# Altium PCB ST-LINK-V0.1.PcbDoc (part 1 of 3)
Units mm, origin at the board's own origin, x right, y up, seen from the top; angles counter-clockwise.
Board outline 100 x 100 mm, 2 copper layers (Top Layer, Bottom Layer); 380 components, 33 nets, 1370 pads, 550 vias.
Unrouted connection lines stored in the file: 288.
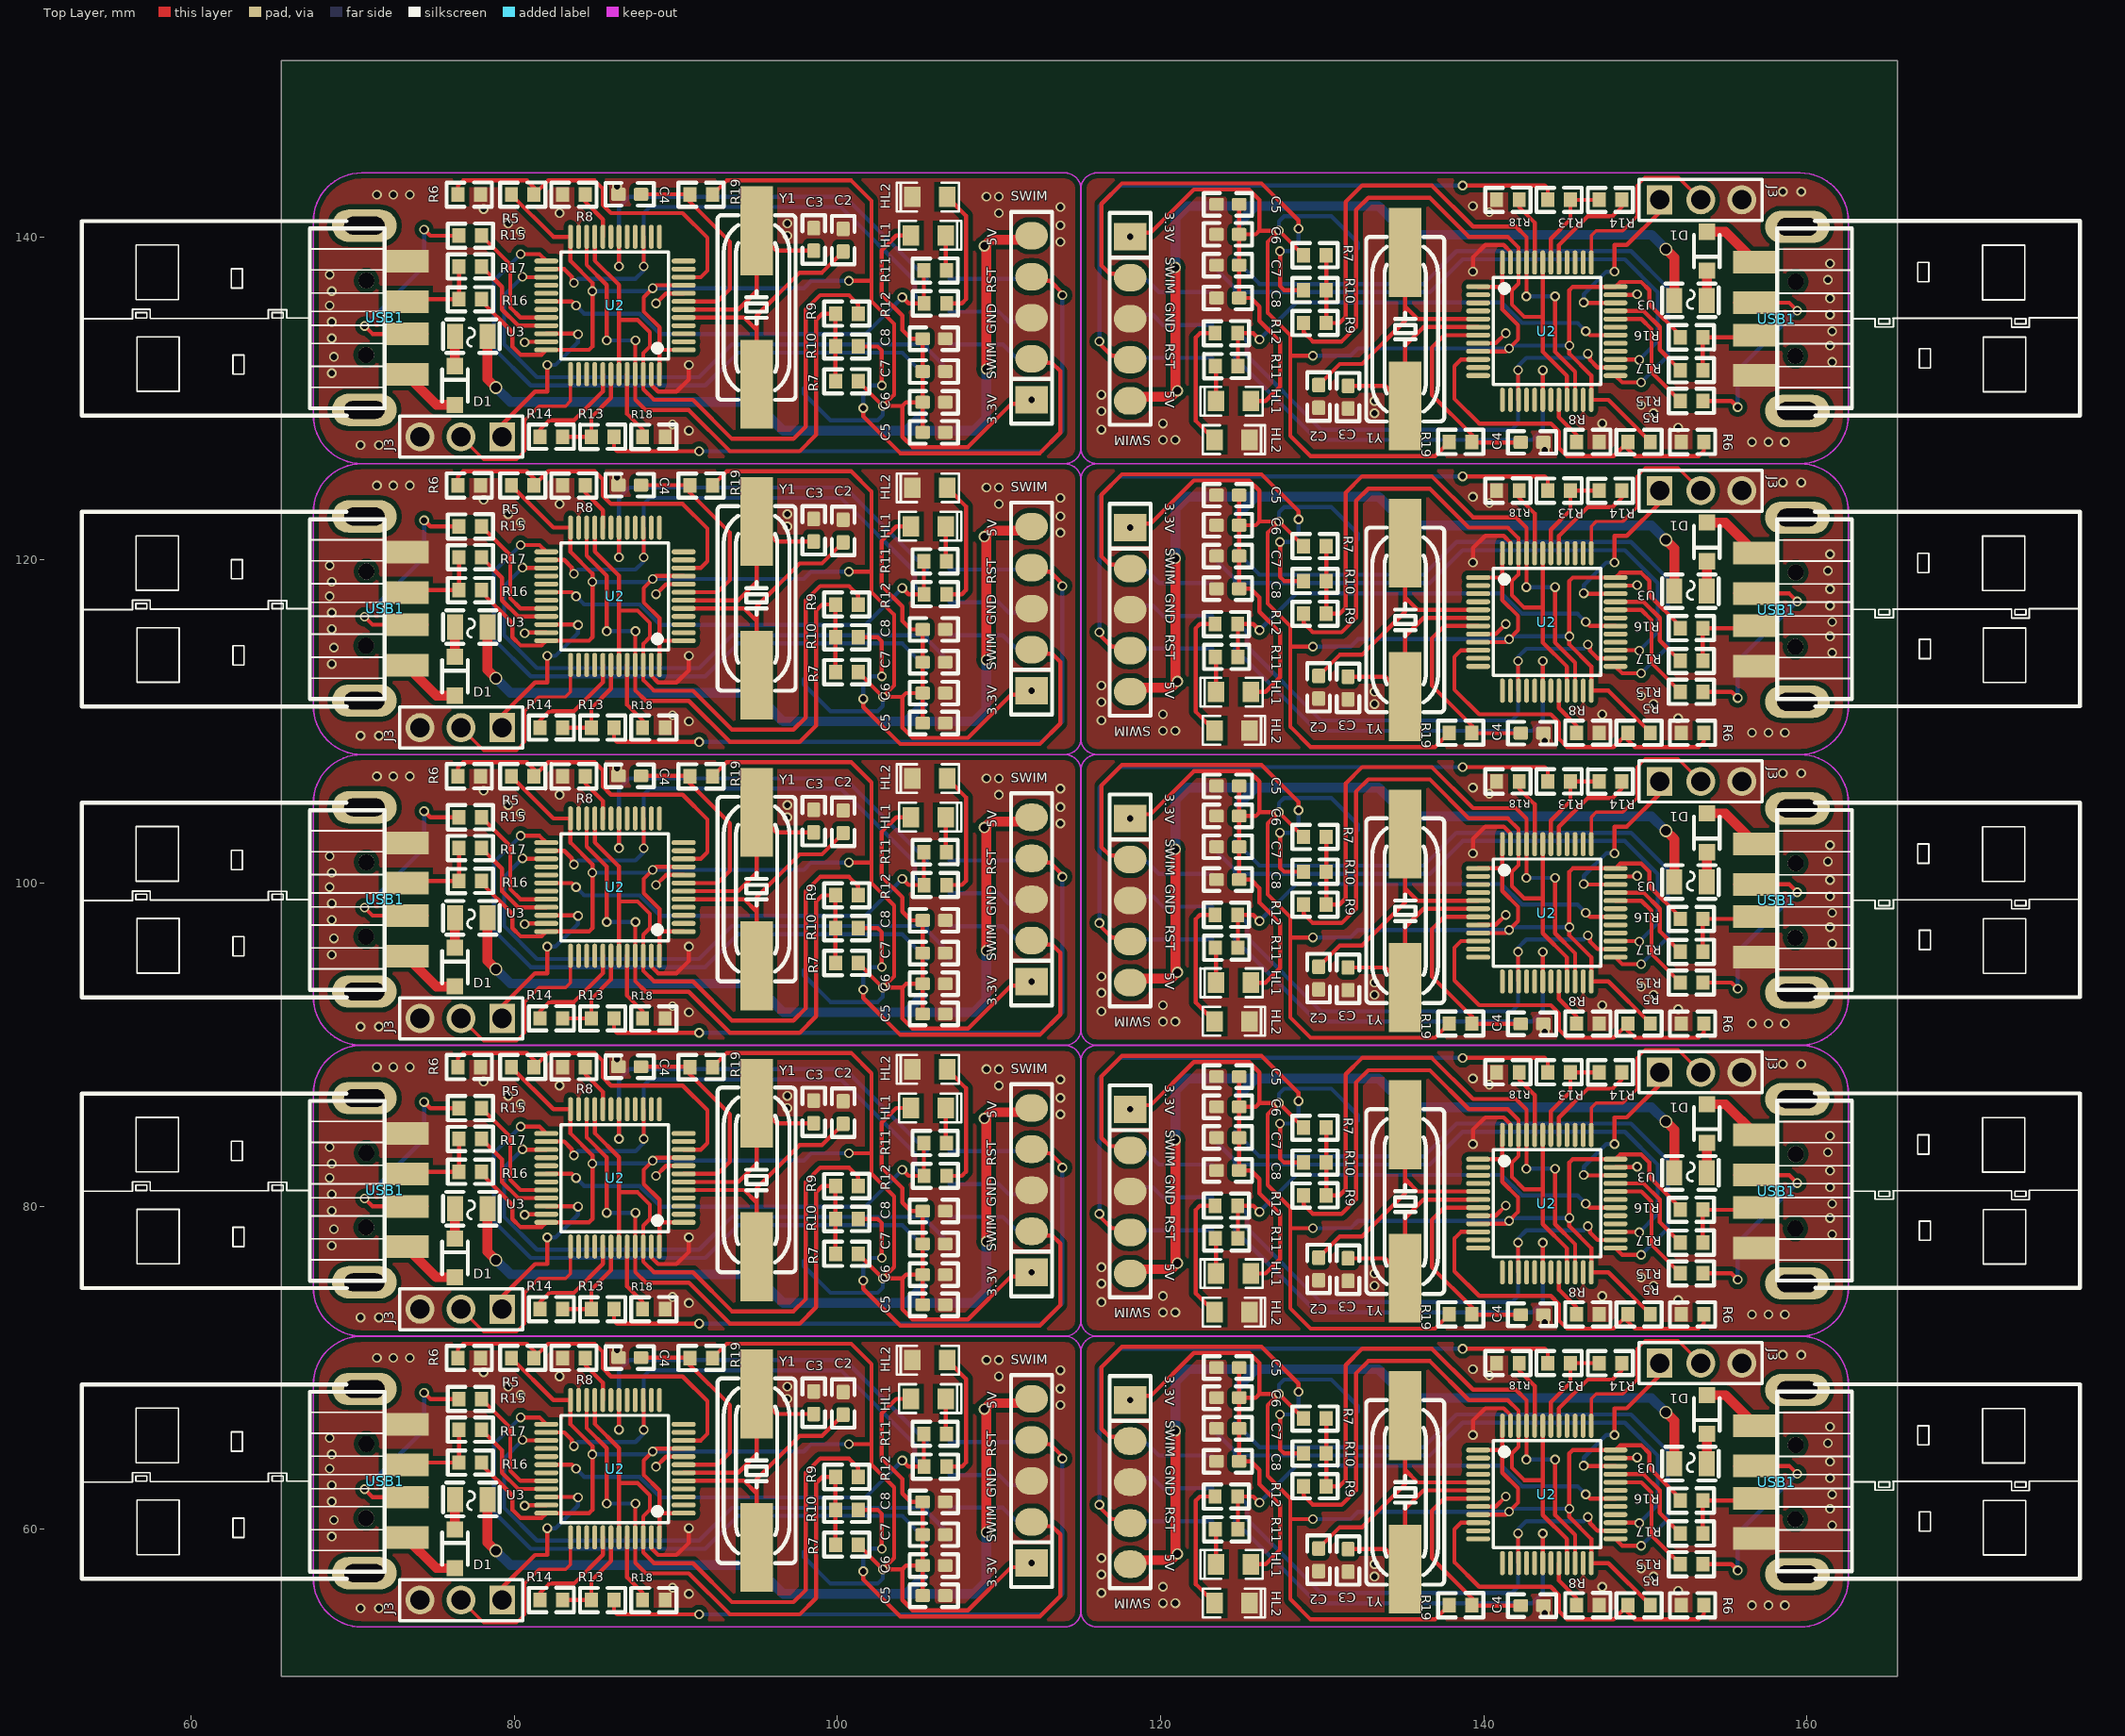
[diagram p0: Top Layer view]
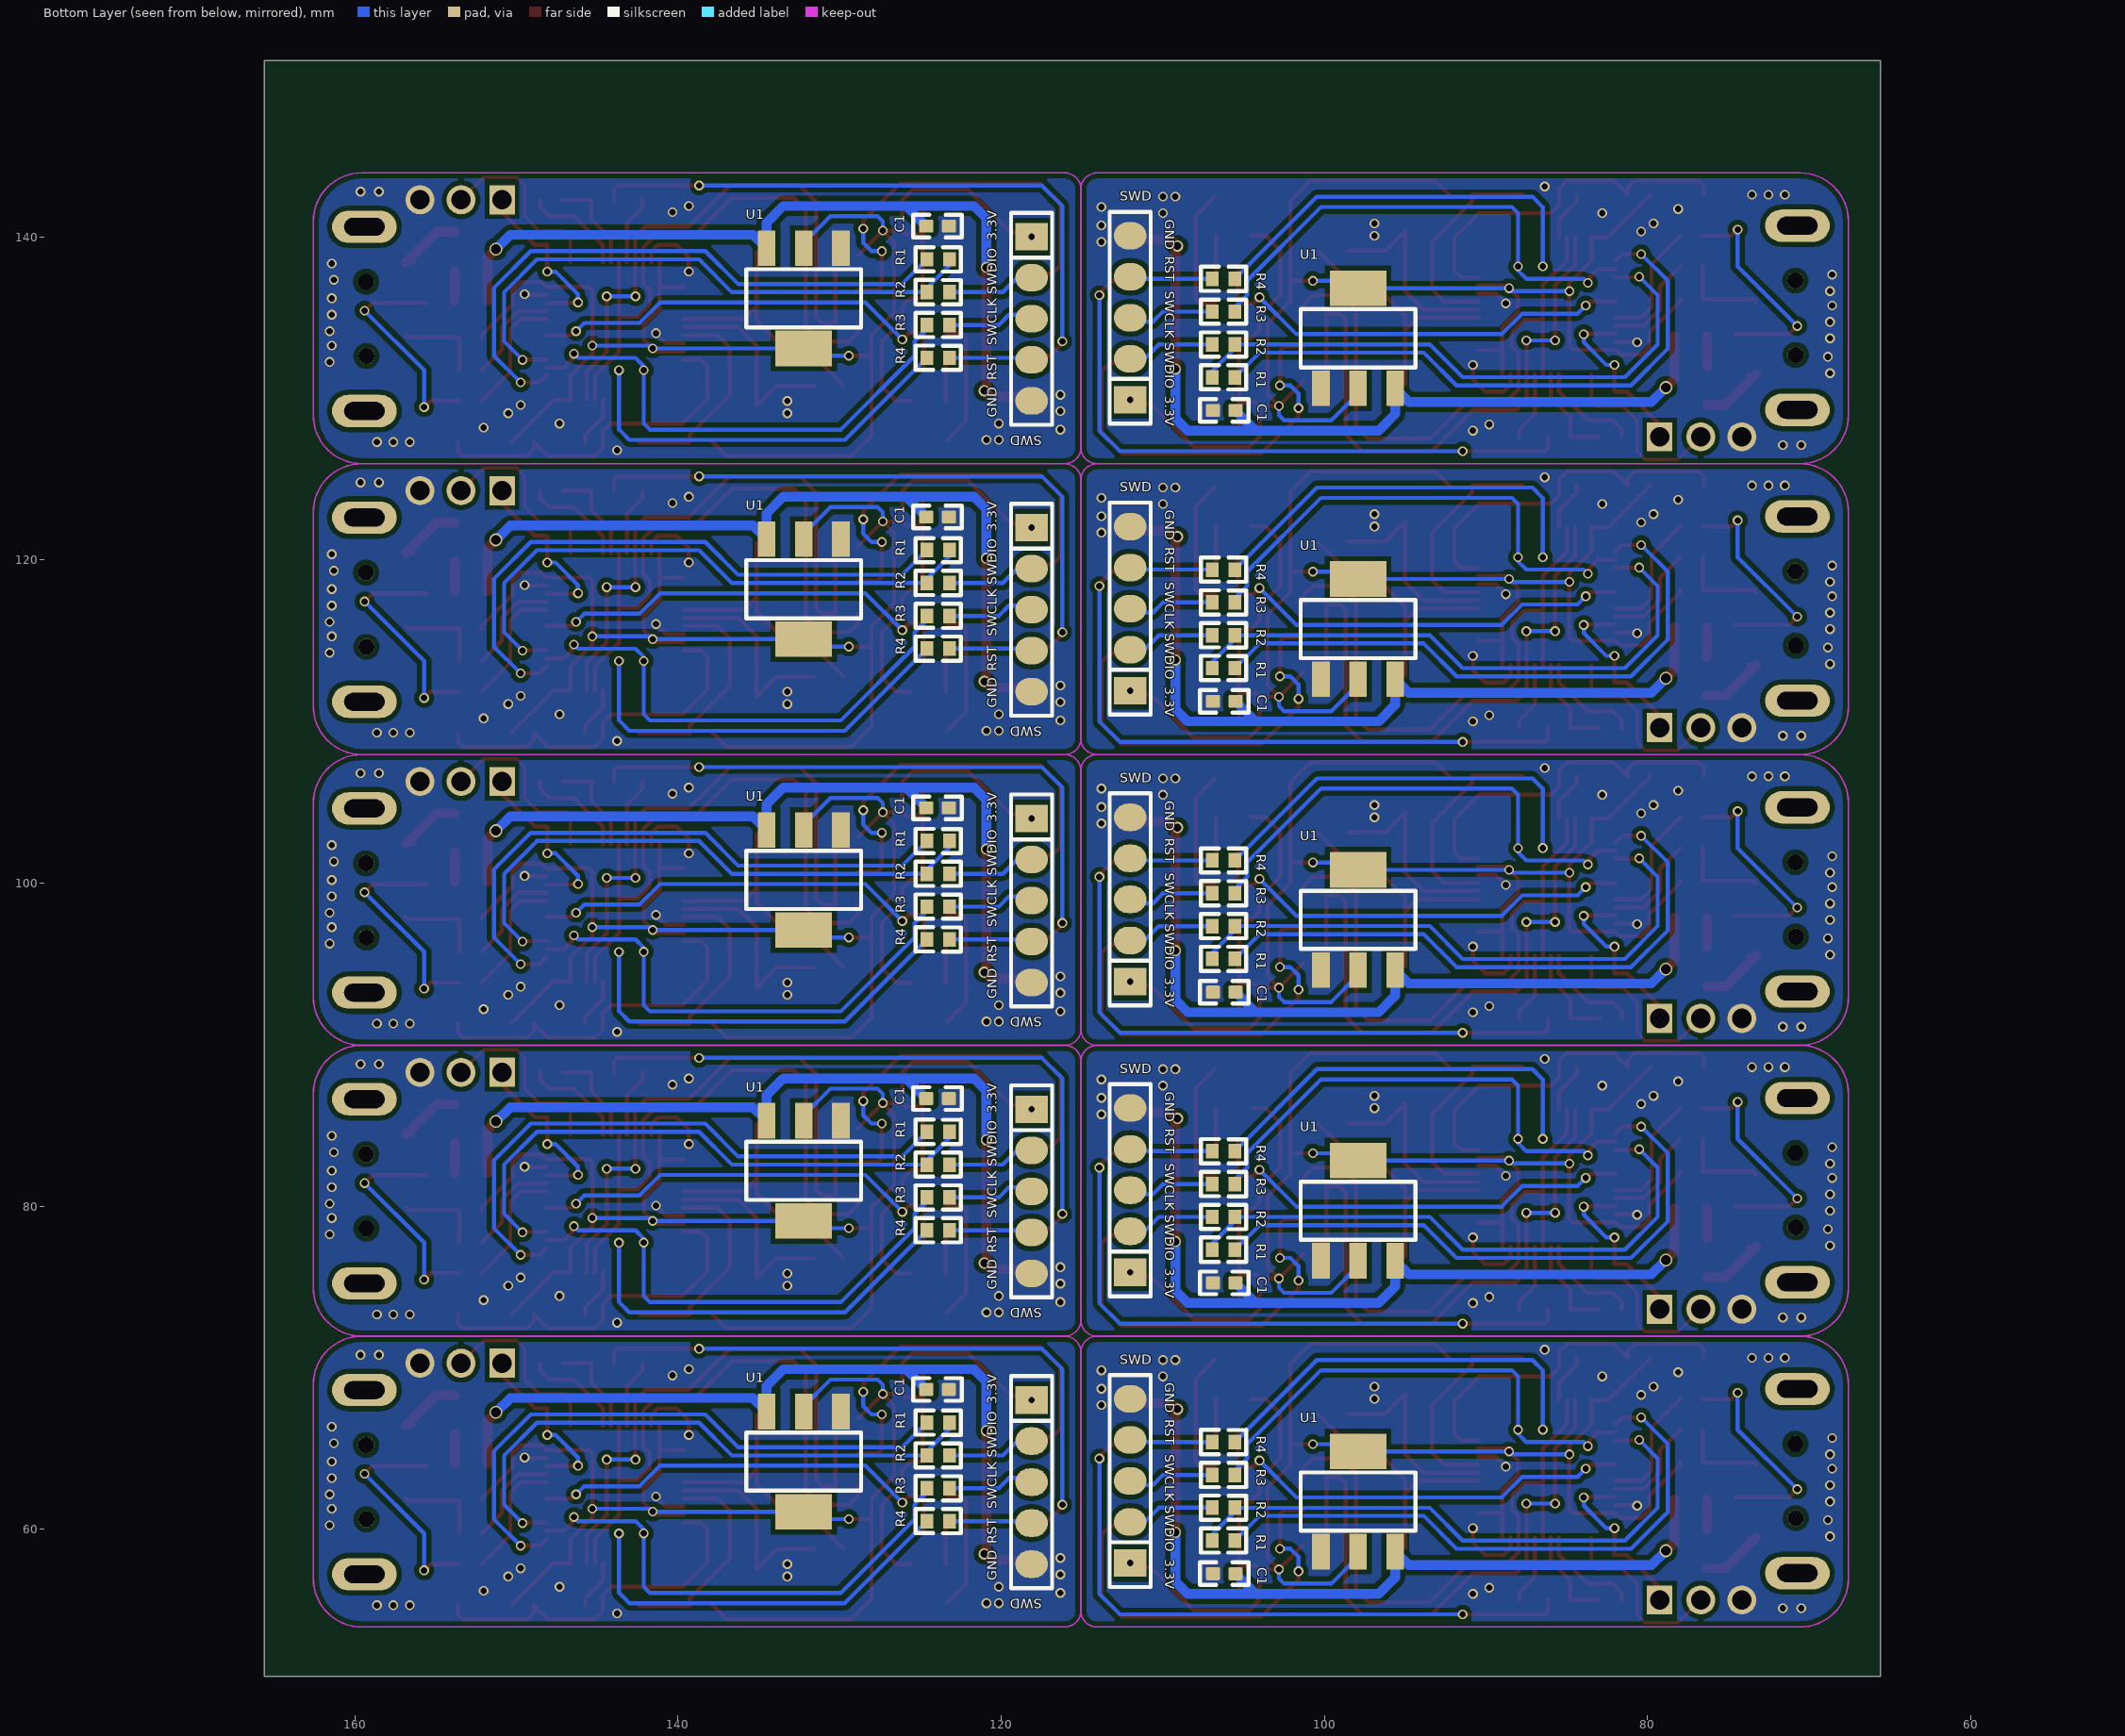
[diagram p1: Bottom Layer view, seen from below]

## Layer stack, top to bottom
Top Solder: solder mask 0.0102, Solder Resist, Dk 3.5
Top Layer: signal copper 0.0356
Dielectric 1: dielectric 0.32, FR-4, Dk 4.8
Bottom Layer: signal copper 0.0356
Bottom Solder: solder mask 0.0102, Solder Resist, Dk 3.5

## Board outline
65.582,50.896 65.582,150.897 165.582,150.897 165.582,50.896

## Design rules (kind name [scope] priority, off if disabled: settings)
Clearance Clearance_1 [InPolygon] p1: gap=0.3
Clearance [All] p2: gap=0.01
ComponentClearance [All] p1 off: gap=0.254 collisioncheckmode=3 verticalgap=0.254 showdistances=FALSE
PolygonConnect via [IsVia] p1: connectstyle=Direct reliefconductorwidth=0.254 reliefentries=4 polygonreliefangle="90 Angle" airgapwidth=0.254
PolygonConnect [All] p2: connectstyle=Direct reliefconductorwidth=0.254 reliefentries=4 polygonreliefangle="90 Angle" airgapwidth=0.254
RoutingVias [All] p1: holewidth=0.4 width=0.6 viastyle="Through Hole" minholewidth=0.3 minwidth=0.2 maxholewidth=0.8 maxwidth=1
SolderMaskExpansion [All] p1: expansion=0.102
Width [All] p1: maxlimit=5 minlimit=0.1 preferedwidth=0.254
29 further rules are at their usual default settings.

## Components (designator, comment, footprint, x,y, rotation, side; value= is the part's Value field where it differs from the comment)
C1 "10uF" 0603-C 106.172,129.404 r180 bottom
C1 "10uF" 0603-C 123.955,140.513 r0 bottom
C1 "10uF" 0603-C 106.172,111.404 r180 bottom
C1 "10uF" 0603-C 123.955,122.513 r0 bottom
C1 "10uF" 0603-C 106.172,93.404 r180 bottom
C1 "10uF" 0603-C 123.955,104.513 r0 bottom
C1 "10uF" 0603-C 106.172,75.404 r180 bottom
C1 "10uF" 0603-C 123.955,86.513 r0 bottom
C1 "10uF" 0603-C 123.955,68.513 r0 bottom
C1 "10uF" 0603-C 106.172,57.404 r180 bottom
C2 "22pF" 0603-C 100.203,139.818 r90 top
C2 "22pF" 0603-C 129.924,130.099 r270 top
C2 "22pF" 0603-C 100.203,121.818 r90 top
C2 "22pF" 0603-C 129.924,112.099 r270 top
C2 "22pF" 0603-C 100.203,103.818 r90 top
C2 "22pF" 0603-C 129.924,94.099 r270 top
C2 "22pF" 0603-C 100.203,85.818 r90 top
C2 "22pF" 0603-C 129.924,76.099 r270 top
C2 "22pF" 0603-C 129.924,58.099 r270 top
C2 "22pF" 0603-C 100.203,67.818 r90 top
C3 "22pF" 0603-C 98.679,139.818 r270 top
C3 "22pF" 0603-C 131.448,130.099 r90 top
C3 "22pF" 0603-C 98.679,121.818 r270 top
C3 "22pF" 0603-C 131.448,112.099 r90 top
C3 "22pF" 0603-C 98.679,103.818 r270 top
C3 "22pF" 0603-C 131.448,94.099 r90 top
C3 "22pF" 0603-C 98.679,85.818 r270 top
C3 "22pF" 0603-C 131.448,76.099 r90 top
C3 "22pF" 0603-C 131.448,58.099 r90 top
C3 "22pF" 0603-C 98.679,67.818 r270 top
C4 "0.1uF" 0603-C 87.122,142.485 r180 top
C4 "0.1uF" 0603-C 143.005,127.432 r0 top
C4 "0.1uF" 0603-C 87.122,124.485 r180 top
C4 "0.1uF" 0603-C 143.005,109.432 r0 top
C4 "0.1uF" 0603-C 87.122,106.485 r180 top
C4 "0.1uF" 0603-C 143.005,91.432 r0 top
C4 "0.1uF" 0603-C 87.122,88.485 r180 top
C4 "0.1uF" 0603-C 143.005,73.432 r0 top
C4 "0.1uF" 0603-C 143.005,55.432 r0 top
C4 "0.1uF" 0603-C 87.122,70.485 r180 top
C5 "10uF" 0603-C 105.948,127.753 r180 top
C5 "10uF" 0603-C 124.18,142.164 r0 top
C5 "10uF" 0603-C 105.948,109.753 r180 top
C5 "10uF" 0603-C 124.18,124.164 r0 top
C5 "10uF" 0603-C 105.948,91.753 r180 top
C5 "10uF" 0603-C 124.18,106.164 r0 top
C5 "10uF" 0603-C 105.948,73.753 r180 top
C5 "10uF" 0603-C 124.18,88.164 r0 top
C5 "10uF" 0603-C 124.18,70.164 r0 top
C5 "10uF" 0603-C 105.948,55.753 r180 top
C6 "0.1uF" 0603-C 105.992,129.912 r0 top
C6 "0.1uF" 0603-C 124.136,140.005 r180 top
C6 "0.1uF" 0603-C 105.992,111.912 r0 top
C6 "0.1uF" 0603-C 124.136,122.005 r180 top
C6 "0.1uF" 0603-C 105.992,93.912 r0 top
C6 "0.1uF" 0603-C 124.136,104.005 r180 top
C6 "0.1uF" 0603-C 105.992,75.912 r0 top
C6 "0.1uF" 0603-C 124.136,86.005 r180 top
C6 "0.1uF" 0603-C 124.136,68.005 r180 top
C6 "0.1uF" 0603-C 105.992,57.912 r0 top
C7 "0.1uF" 0603-C 105.992,131.817 r0 top
C7 "0.1uF" 0603-C 124.136,138.1 r180 top
C7 "0.1uF" 0603-C 105.992,113.817 r0 top
C7 "0.1uF" 0603-C 124.136,120.1 r180 top
C7 "0.1uF" 0603-C 105.992,95.817 r0 top
C7 "0.1uF" 0603-C 124.136,102.1 r180 top
C7 "0.1uF" 0603-C 105.992,77.817 r0 top
C7 "0.1uF" 0603-C 124.136,84.1 r180 top
C7 "0.1uF" 0603-C 124.136,66.1 r180 top
C7 "0.1uF" 0603-C 105.992,59.817 r0 top
C8 "0.1uF" 0603-C 105.992,133.849 r0 top
C8 "0.1uF" 0603-C 124.136,136.068 r180 top
C8 "0.1uF" 0603-C 105.992,115.849 r0 top
C8 "0.1uF" 0603-C 124.136,118.068 r180 top
C8 "0.1uF" 0603-C 105.992,97.849 r0 top
C8 "0.1uF" 0603-C 124.136,100.068 r180 top
C8 "0.1uF" 0603-C 105.992,79.849 r0 top
C8 "0.1uF" 0603-C 124.136,82.068 r180 top
C8 "0.1uF" 0603-C 124.136,64.068 r180 top
C8 "0.1uF" 0603-C 105.992,61.849 r0 top
D1 "1N5819WS" SOD-323_L1.8-W1.3-LS2.5-RD 76.327,130.801 r270 top
D1 "1N5819WS" SOD-323_L1.8-W1.3-LS2.5-RD 153.8,139.116 r90 top
D1 "1N5819WS" SOD-323_L1.8-W1.3-LS2.5-RD 76.327,112.801 r270 top
D1 "1N5819WS" SOD-323_L1.8-W1.3-LS2.5-RD 153.8,121.116 r90 top
D1 "1N5819WS" SOD-323_L1.8-W1.3-LS2.5-RD 76.327,94.801 r270 top
D1 "1N5819WS" SOD-323_L1.8-W1.3-LS2.5-RD 153.8,103.116 r90 top
D1 "1N5819WS" SOD-323_L1.8-W1.3-LS2.5-RD 76.327,76.801 r270 top
D1 "1N5819WS" SOD-323_L1.8-W1.3-LS2.5-RD 153.8,85.116 r90 top
D1 "1N5819WS" SOD-323_L1.8-W1.3-LS2.5-RD 153.8,67.116 r90 top
D1 "1N5819WS" SOD-323_L1.8-W1.3-LS2.5-RD 76.327,58.801 r270 top
HL1 "LED" LED-0805 105.664,140.072 r0 top
HL1 "LED" LED-0805 124.463,129.845 r180 top
HL1 "LED" LED-0805 105.664,122.072 r0 top
HL1 "LED" LED-0805 124.463,111.845 r180 top
HL1 "LED" LED-0805 105.664,104.072 r0 top
HL1 "LED" LED-0805 124.463,93.845 r180 top
HL1 "LED" LED-0805 105.664,86.072 r0 top
HL1 "LED" LED-0805 124.463,75.845 r180 top
HL1 "LED" LED-0805 124.463,57.845 r180 top
HL1 "LED" LED-0805 105.664,68.072 r0 top
HL2 "LED" LED-0805 105.664,142.485 r180 top
HL2 "LED" LED-0805 124.463,127.432 r0 top
HL2 "LED" LED-0805 105.664,124.485 r180 top
HL2 "LED" LED-0805 124.463,109.432 r0 top
HL2 "LED" LED-0805 105.664,106.485 r180 top
HL2 "LED" LED-0805 124.463,91.432 r0 top
HL2 "LED" LED-0805 105.664,88.485 r180 top
HL2 "LED" LED-0805 124.463,73.432 r0 top
HL2 "LED" LED-0805 124.463,55.432 r0 top
HL2 "LED" LED-0805 105.664,70.485 r180 top
J3 "ISP" CON-3*2.54 76.581,127.626 r180 top
J3 "ISP" CON-3*2.54 153.546,142.291 r0 top
J3 "ISP" CON-3*2.54 76.581,109.626 r180 top
J3 "ISP" CON-3*2.54 153.546,124.291 r0 top
J3 "ISP" CON-3*2.54 76.581,91.626 r180 top
J3 "ISP" CON-3*2.54 153.546,106.291 r0 top
J3 "ISP" CON-3*2.54 76.581,73.626 r180 top
J3 "ISP" CON-3*2.54 153.546,88.291 r0 top
J3 "ISP" CON-3*2.54 153.546,70.291 r0 top
J3 "ISP" CON-3*2.54 76.581,55.626 r180 top
R1 "100R" R-0603 106.361,131.309 r0 bottom
R1 "100R" R-0603 123.766,138.608 r180 bottom
R1 "100R" R-0603 106.361,113.309 r0 bottom
R1 "100R" R-0603 123.766,120.608 r180 bottom
R1 "100R" R-0603 106.361,95.309 r0 bottom
R1 "100R" R-0603 123.766,102.608 r180 bottom
R1 "100R" R-0603 106.361,77.309 r0 bottom
R1 "100R" R-0603 123.766,84.608 r180 bottom
R1 "100R" R-0603 123.766,66.608 r180 bottom
R1 "100R" R-0603 106.361,59.309 r0 bottom
R2 "20R" R-0603 106.107,133.341 r180 bottom
R2 "20R" R-0603 124.02,136.576 r0 bottom
R2 "20R" R-0603 106.107,115.341 r180 bottom
R2 "20R" R-0603 124.02,118.576 r0 bottom
R2 "20R" R-0603 106.107,97.341 r180 bottom
R2 "20R" R-0603 124.02,100.576 r0 bottom
R2 "20R" R-0603 106.107,79.341 r180 bottom
R2 "20R" R-0603 124.02,82.576 r0 bottom
R2 "20R" R-0603 124.02,64.576 r0 bottom
R2 "20R" R-0603 106.107,61.341 r180 bottom
R3 "20R" R-0603 106.107,135.373 r180 bottom
R3 "20R" R-0603 124.02,134.544 r0 bottom
R3 "20R" R-0603 106.107,117.373 r180 bottom
R3 "20R" R-0603 124.02,116.544 r0 bottom
R3 "20R" R-0603 106.107,99.373 r180 bottom
R3 "20R" R-0603 124.02,98.544 r0 bottom
R3 "20R" R-0603 106.107,81.373 r180 bottom
R3 "20R" R-0603 124.02,80.544 r0 bottom
R3 "20R" R-0603 124.02,62.544 r0 bottom
R3 "20R" R-0603 106.107,63.373 r180 bottom
R4 "20R" R-0603 106.107,137.405 r180 bottom
R4 "20R" R-0603 124.02,132.512 r0 bottom
R4 "20R" R-0603 106.107,119.405 r180 bottom
R4 "20R" R-0603 124.02,114.512 r0 bottom
R4 "20R" R-0603 106.107,101.405 r180 bottom
R4 "20R" R-0603 124.02,96.512 r0 bottom
R4 "20R" R-0603 106.107,83.405 r180 bottom
R4 "20R" R-0603 124.02,78.512 r0 bottom
R4 "20R" R-0603 124.02,60.512 r0 bottom
R4 "20R" R-0603 106.107,65.405 r180 bottom
R5 "4.7K" R-0603 80.645,142.612 r0 top
R5 "4.7K" R-0603 149.482,127.305 r180 top
R5 "4.7K" R-0603 80.645,124.612 r0 top
R5 "4.7K" R-0603 149.482,109.305 r180 top
R5 "4.7K" R-0603 80.645,106.612 r0 top
R5 "4.7K" R-0603 149.482,91.305 r180 top
R5 "4.7K" R-0603 80.645,88.612 r0 top
R5 "4.7K" R-0603 149.482,73.305 r180 top
R5 "4.7K" R-0603 149.482,55.305 r180 top
R5 "4.7K" R-0603 80.645,70.612 r0 top
R6 "4.7K" R-0603 77.343,142.612 r0 top
R6 "4.7K" R-0603 152.784,127.305 r180 top
R6 "4.7K" R-0603 77.343,124.612 r0 top
R6 "4.7K" R-0603 152.784,109.305 r180 top
R6 "4.7K" R-0603 77.343,106.612 r0 top
R6 "4.7K" R-0603 152.784,91.305 r180 top
R6 "4.7K" R-0603 77.343,88.612 r0 top
R6 "4.7K" R-0603 152.784,73.305 r180 top
R6 "4.7K" R-0603 152.784,55.305 r180 top
R6 "4.7K" R-0603 77.343,70.612 r0 top
R7 "680R" R-0603 100.711,131.055 r0 top
R7 "680R" R-0603 129.416,138.862 r180 top
R7 "680R" R-0603 100.711,113.055 r0 top
R7 "680R" R-0603 129.416,120.862 r180 top
R7 "680R" R-0603 100.711,95.055 r0 top
R7 "680R" R-0603 129.416,102.862 r180 top
R7 "680R" R-0603 100.711,77.055 r0 top
R7 "680R" R-0603 129.416,84.862 r180 top
R7 "680R" R-0603 129.416,66.862 r180 top
R7 "680R" R-0603 100.711,59.055 r0 top
R8 "10K" R-0603 83.566,142.612 r180 top
R8 "10K" R-0603 146.561,127.305 r0 top
R8 "10K" R-0603 83.566,124.612 r180 top
R8 "10K" R-0603 146.561,109.305 r0 top
R8 "10K" R-0603 83.566,106.612 r180 top
R8 "10K" R-0603 146.561,91.305 r0 top
R8 "10K" R-0603 83.566,88.612 r180 top
R8 "10K" R-0603 146.561,73.305 r0 top
R8 "10K" R-0603 146.561,55.305 r0 top
R8 "10K" R-0603 83.566,70.612 r180 top
R9 "220R" R-0603 100.711,135.246 r0 top
R9 "220R" R-0603 129.416,134.671 r180 top
R9 "220R" R-0603 100.711,117.246 r0 top
R9 "220R" R-0603 129.416,116.671 r180 top
R9 "220R" R-0603 100.711,99.246 r0 top
R9 "220R" R-0603 129.416,98.671 r180 top
R9 "220R" R-0603 100.711,81.246 r0 top
R9 "220R" R-0603 129.416,80.671 r180 top
R9 "220R" R-0603 129.416,62.671 r180 top
R9 "220R" R-0603 100.711,63.246 r0 top
R10 "20R" R-0603 100.457,133.214 r180 top
R10 "20R" R-0603 129.67,136.703 r0 top
R10 "20R" R-0603 100.457,115.214 r180 top
R10 "20R" R-0603 129.67,118.703 r0 top
R10 "20R" R-0603 100.457,97.214 r180 top
R10 "20R" R-0603 129.67,100.703 r0 top
R10 "20R" R-0603 100.457,79.214 r180 top
R10 "20R" R-0603 129.67,82.703 r0 top
R10 "20R" R-0603 129.67,64.703 r0 top
R10 "20R" R-0603 100.457,61.214 r180 top
R11 "1K" R-0603 106.172,137.913 r0 top
R11 "1K" R-0603 123.955,132.004 r180 top
R11 "1K" R-0603 106.172,119.913 r0 top
R11 "1K" R-0603 123.955,114.004 r180 top
R11 "1K" R-0603 106.172,101.913 r0 top
R11 "1K" R-0603 123.955,96.004 r180 top
R11 "1K" R-0603 106.172,83.913 r0 top
R11 "1K" R-0603 123.955,78.004 r180 top
R11 "1K" R-0603 123.955,60.004 r180 top
R11 "1K" R-0603 106.172,65.913 r0 top
R12 "1K" R-0603 106.196,135.881 r0 top
R12 "1K" R-0603 123.932,134.036 r180 top
R12 "1K" R-0603 106.196,117.881 r0 top
R12 "1K" R-0603 123.932,116.036 r180 top
R12 "1K" R-0603 106.196,99.881 r0 top
R12 "1K" R-0603 123.932,98.036 r180 top
R12 "1K" R-0603 106.196,81.881 r0 top
R12 "1K" R-0603 123.932,80.036 r180 top
R12 "1K" R-0603 123.932,62.036 r180 top
R12 "1K" R-0603 106.196,63.881 r0 top
R13 "20R" R-0603 85.344,127.626 r180 top
R13 "20R" R-0603 144.783,142.291 r0 top
R13 "20R" R-0603 85.344,109.626 r180 top
R13 "20R" R-0603 144.783,124.291 r0 top
R13 "20R" R-0603 85.344,91.626 r180 top
R13 "20R" R-0603 144.783,106.291 r0 top
R13 "20R" R-0603 85.344,73.626 r180 top
R13 "20R" R-0603 144.783,88.291 r0 top
R13 "20R" R-0603 144.783,70.291 r0 top
R13 "20R" R-0603 85.344,55.626 r180 top
R14 "220R" R-0603 82.423,127.626 r0 top
R14 "220R" R-0603 147.704,142.291 r180 top
R14 "220R" R-0603 82.423,109.626 r0 top
R14 "220R" R-0603 147.704,124.291 r180 top
R14 "220R" R-0603 82.423,91.626 r0 top
R14 "220R" R-0603 147.704,106.291 r180 top
R14 "220R" R-0603 82.423,73.626 r0 top
R14 "220R" R-0603 147.704,88.291 r180 top
R14 "220R" R-0603 147.704,70.291 r180 top
R14 "220R" R-0603 82.423,55.626 r0 top
R15 "22R" R-0603 77.405,140.072 r0 top
R15 "22R" R-0603 152.722,129.845 r180 top
R15 "22R" R-0603 77.405,122.072 r0 top
R15 "22R" R-0603 152.722,111.845 r180 top
R15 "22R" R-0603 77.405,104.072 r0 top
R15 "22R" R-0603 152.722,93.845 r180 top
R15 "22R" R-0603 77.405,86.072 r0 top
R15 "22R" R-0603 152.722,75.845 r180 top
R15 "22R" R-0603 152.722,57.845 r180 top
R15 "22R" R-0603 77.405,68.072 r0 top
R16 "1K" R-0603 77.151,136.135 r180 top
R16 "1K" R-0603 152.976,133.782 r0 top
R16 "1K" R-0603 77.151,118.135 r180 top
R16 "1K" R-0603 152.976,115.782 r0 top
R16 "1K" R-0603 77.151,100.135 r180 top
R16 "1K" R-0603 152.976,97.782 r0 top
R16 "1K" R-0603 77.151,82.135 r180 top
R16 "1K" R-0603 152.976,79.782 r0 top
R16 "1K" R-0603 152.976,61.782 r0 top
R16 "1K" R-0603 77.151,64.135 r180 top
R17 "22R" R-0603 77.405,138.167 r0 top
R17 "22R" R-0603 152.722,131.75 r180 top
R17 "22R" R-0603 77.405,120.167 r0 top
R17 "22R" R-0603 152.722,113.75 r180 top
R17 "22R" R-0603 77.405,102.167 r0 top
R17 "22R" R-0603 152.722,95.75 r180 top
R17 "22R" R-0603 77.405,84.167 r0 top
R17 "22R" R-0603 152.722,77.75 r180 top
R17 "22R" R-0603 152.722,59.75 r180 top
R17 "22R" R-0603 77.405,66.167 r0 top
R18 "10K" R-0603 88.519,127.626 r180 top
R18 "10K" R-0603 141.608,142.291 r0 top
R18 "10K" R-0603 88.519,109.626 r180 top
R18 "10K" R-0603 141.608,124.291 r0 top
R18 "10K" R-0603 88.519,91.626 r180 top
R18 "10K" R-0603 141.608,106.291 r0 top
R18 "10K" R-0603 88.519,73.626 r180 top
R18 "10K" R-0603 141.608,88.291 r0 top
R18 "10K" R-0603 141.608,70.291 r0 top
R18 "10K" R-0603 88.519,55.626 r180 top
R19 "10K" R-0603 91.44,142.612 r180 top
R19 "10K" R-0603 138.687,127.305 r0 top
R19 "10K" R-0603 91.44,124.612 r180 top
R19 "10K" R-0603 138.687,109.305 r0 top
R19 "10K" R-0603 91.44,106.612 r180 top
R19 "10K" R-0603 138.687,91.305 r0 top
R19 "10K" R-0603 91.44,88.612 r180 top
R19 "10K" R-0603 138.687,73.305 r0 top
R19 "10K" R-0603 138.687,55.305 r0 top
R19 "10K" R-0603 91.44,70.612 r180 top
SWD "SWD" 牛角座 112.014,134.992 r90 bottom (schematic designator J1)
SWD "SWD" 牛角座 118.113,134.925 r270 bottom (schematic designator J1)
SWD "SWD" 牛角座 112.014,116.992 r90 bottom (schematic designator J1)
SWD "SWD" 牛角座 118.113,116.925 r270 bottom (schematic designator J1)
SWD "SWD" 牛角座 112.014,98.992 r90 bottom (schematic designator J1)
SWD "SWD" 牛角座 118.113,98.925 r270 bottom (schematic designator J1)
SWD "SWD" 牛角座 112.014,80.992 r90 bottom (schematic designator J1)
SWD "SWD" 牛角座 118.113,80.925 r270 bottom (schematic designator J1)
SWD "SWD" 牛角座 118.113,62.925 r270 bottom (schematic designator J1)
SWD "SWD" 牛角座 112.014,62.992 r90 bottom (schematic designator J1)
SWIM "SWIM" 牛角座 112.014,134.992 r90 top (schematic designator J2)
SWIM "SWIM" 牛角座 118.113,134.925 r270 top (schematic designator J2)
SWIM "SWIM" 牛角座 112.014,116.992 r90 top (schematic designator J2)
SWIM "SWIM" 牛角座 118.113,116.925 r270 top (schematic designator J2)
SWIM "SWIM" 牛角座 112.014,98.992 r90 top (schematic designator J2)
SWIM "SWIM" 牛角座 118.113,98.925 r270 top (schematic designator J2)
SWIM "SWIM" 牛角座 112.014,80.992 r90 top (schematic designator J2)
SWIM "SWIM" 牛角座 118.113,80.925 r270 top (schematic designator J2)
SWIM "SWIM" 牛角座 118.113,62.925 r270 top (schematic designator J2)
SWIM "SWIM" 牛角座 112.014,62.992 r90 top (schematic designator J2)
U1 "ASPL1117-3.3-DT-R/SOT223" SOT223 97.79,133.595 r270 bottom
U1 "ASPL1117-3.3-DT-R/SOT223" SOT223 132.337,136.322 r90 bottom
U1 "ASPL1117-3.3-DT-R/SOT223" SOT223 97.79,115.595 r270 bottom
U1 "ASPL1117-3.3-DT-R/SOT223" SOT223 132.337,118.322 r90 bottom
U1 "ASPL1117-3.3-DT-R/SOT223" SOT223 97.79,97.595 r270 bottom
U1 "ASPL1117-3.3-DT-R/SOT223" SOT223 132.337,100.322 r90 bottom
U1 "ASPL1117-3.3-DT-R/SOT223" SOT223 97.79,79.595 r270 bottom
U1 "ASPL1117-3.3-DT-R/SOT223" SOT223 132.337,82.322 r90 bottom
U1 "ASPL1117-3.3-DT-R/SOT223" SOT223 132.337,64.322 r90 bottom
U1 "ASPL1117-3.3-DT-R/SOT223" SOT223 97.79,61.595 r270 bottom
U2 "STM32F103C8T6" LQFP-48_L7.0-W7.0-P0.50-LS9.0-BL 86.233,135.754 r90 top
U2 "STM32F103C8T6" LQFP-48_L7.0-W7.0-P0.50-LS9.0-BL 143.894,134.163 r270 top
U2 "STM32F103C8T6" LQFP-48_L7.0-W7.0-P0.50-LS9.0-BL 86.233,117.754 r90 top
U2 "STM32F103C8T6" LQFP-48_L7.0-W7.0-P0.50-LS9.0-BL 143.894,116.163 r270 top
U2 "STM32F103C8T6" LQFP-48_L7.0-W7.0-P0.50-LS9.0-BL 86.233,99.754 r90 top
U2 "STM32F103C8T6" LQFP-48_L7.0-W7.0-P0.50-LS9.0-BL 143.894,98.163 r270 top
U2 "STM32F103C8T6" LQFP-48_L7.0-W7.0-P0.50-LS9.0-BL 86.233,81.754 r90 top
U2 "STM32F103C8T6" LQFP-48_L7.0-W7.0-P0.50-LS9.0-BL 143.894,80.163 r270 top
U2 "STM32F103C8T6" LQFP-48_L7.0-W7.0-P0.50-LS9.0-BL 143.894,62.163 r270 top
U2 "STM32F103C8T6" LQFP-48_L7.0-W7.0-P0.50-LS9.0-BL 86.233,63.754 r90 top
U3 "MF-PSMF110X-2" F0805 77.343,133.849 r0 top
U3 "MF-PSMF110X-2" F0805 152.784,136.068 r180 top
U3 "MF-PSMF110X-2" F0805 77.343,115.849 r0 top
U3 "MF-PSMF110X-2" F0805 152.784,118.068 r180 top
U3 "MF-PSMF110X-2" F0805 77.343,97.849 r0 top
U3 "MF-PSMF110X-2" F0805 152.784,100.068 r180 top
U3 "MF-PSMF110X-2" F0805 77.343,79.849 r0 top
U3 "MF-PSMF110X-2" F0805 152.784,82.068 r180 top
U3 "MF-PSMF110X-2" F0805 152.784,64.068 r180 top
U3 "MF-PSMF110X-2" F0805 77.343,61.849 r0 top
USB1 "USB-A-A/M" USB-A-SMD_USB-A-1-TH 72.009,134.992 r180 top
USB1 "USB-A-A/M" USB-A-SMD_USB-A-1-TH 158.118,134.925 r0 top
USB1 "USB-A-A/M" USB-A-SMD_USB-A-1-TH 72.009,116.992 r180 top
USB1 "USB-A-A/M" USB-A-SMD_USB-A-1-TH 158.118,116.925 r0 top
USB1 "USB-A-A/M" USB-A-SMD_USB-A-1-TH 72.009,98.992 r180 top
USB1 "USB-A-A/M" USB-A-SMD_USB-A-1-TH 158.118,98.925 r0 top
USB1 "USB-A-A/M" USB-A-SMD_USB-A-1-TH 72.009,80.992 r180 top
USB1 "USB-A-A/M" USB-A-SMD_USB-A-1-TH 158.118,80.925 r0 top
USB1 "USB-A-A/M" USB-A-SMD_USB-A-1-TH 158.118,62.925 r0 top
USB1 "USB-A-A/M" USB-A-SMD_USB-A-1-TH 72.009,62.992 r180 top
Y1 "8MHz" 8M-crystals 94.869,135.627 r270 top
Y1 "8MHz" 8M-crystals 135.258,134.29 r90 top
Y1 "8MHz" 8M-crystals 94.869,117.627 r270 top
Y1 "8MHz" 8M-crystals 135.258,116.29 r90 top
Y1 "8MHz" 8M-crystals 94.869,99.627 r270 top
Y1 "8MHz" 8M-crystals 135.258,98.29 r90 top
Y1 "8MHz" 8M-crystals 94.869,81.627 r270 top
Y1 "8MHz" 8M-crystals 135.258,80.29 r90 top
Y1 "8MHz" 8M-crystals 135.258,62.29 r90 top
Y1 "8MHz" 8M-crystals 94.869,63.627 r270 top

## Footprints (in the part's own frame and the unit in brackets; to place one, negate y for a bottom-side part, rotate by r counter-clockwise, add the part's x,y. Pads: shape width x height; smd on the part's side, far side on the other; paste and mask are expansions set on the pad)
8M-crystals [mm]
  rect 5.5x2 smd: 1(-4.75,0.127) 2(4.75,0.127)
  silkscreen extent -5.72,-2.29 5.72,2.54
0603-C [mm]
  rrect25% 0.9x0.8 smd: 1(-0.722,-0.149) 2(0.678,-0.149)
  silkscreen extent -1.52,-0.85 1.48,0.55, body extent -0.84,-0.55 0.76,0.25, height 0.3
CON-3*2.54 [mm]
  rect 1.575x1.8 hole 1.2: 1(-2.667,0)
  round 1.8 hole 1.2: 2(-0.127,0) 3(2.413,0)
  silkscreen extent -3.94,-1.27 3.68,1.27
F0805 [mm]
  rect 1x1.55 smd: 1(-1,0) 2(1,0)
  silkscreen extent -1.75,-1.04 1.75,1.04
LED-0805 [mil]
  rect 40x50 smd: 1(-44.23,0.28) 2(40.77,0.28)
  silkscreen extent -73,-34 79,36, body extent -42,-24 38,25, height 43
LQFP-48_L7.0-W7.0-P0.50-LS9.0-BL [mm]
  oval 0.3x1.5 smd: 1(-2.75,-4.25) 2(-2.25,-4.25) 3(-1.75,-4.25) 4(-1.25,-4.25) 5(-0.75,-4.25) 6(-0.25,-4.25) 7(0.25,-4.25) 8(0.75,-4.25) 9(1.25,-4.25) 10(1.75,-4.25) 11(2.25,-4.25) 12(2.75,-4.25) 25(2.75,4.25) 26(2.25,4.25) 27(1.75,4.25) 28(1.25,4.25) 29(0.75,4.25) 30(0.25,4.25) 31(-0.25,4.25) 32(-0.75,4.25) 33(-1.25,4.25) 34(-1.75,4.25) 35(-2.25,4.25) 36(-2.75,4.25)
  oval 1.5x0.3 smd: 13(4.25,-2.75) 14(4.25,-2.25) 15(4.25,-1.75) 16(4.25,-1.25) 17(4.25,-0.75) 18(4.25,-0.25) 19(4.25,0.25) 20(4.25,0.75) 21(4.25,1.25) 22(4.25,1.75) 23(4.25,2.25) 24(4.25,2.75) 37(-4.25,2.75) 38(-4.25,2.25) 39(-4.25,1.75) 40(-4.25,1.25) 41(-4.25,0.75) 42(-4.25,0.25) 43(-4.25,-0.25) 44(-4.25,-0.75) 45(-4.25,-1.25) 46(-4.25,-1.75) 47(-4.25,-2.25) 48(-4.25,-2.75)
  silkscreen extent -3.33,-3.31 3.3,3.34
R-0603 [mm]
  rect 0.8x0.9 smd: 1(-0.827,0) 2(0.573,0)
  silkscreen extent -1.53,-0.76 1.27,0.75
SOD-323_L1.8-W1.3-LS2.5-RD [mm]
  rect 1x1 smd: 1(-1.2,0) 2(1.2,0)
  silkscreen extent -1,-0.8 1,0.8
SOT223 [mm]
  rect 2.2x1.1 smd: 1(2.972,-2.427) 2(2.972,-0.127) 3(2.972,2.173)
  rect 2.2x3.5 smd: 4(-3.226,-0.127)
  silkscreen extent -1.93,-3.68 1.67,3.42
USB-A-SMD_USB-A-1-TH [mm]
  rect 2.8x1.4 smd: 1(-1.283,3.5) 2(-1.283,1) 3(-1.283,-1) 4(-1.283,-3.5)
  oval 4x2 hole 1.1 slot 2.5 at 0 deg: 5(1.283,5.7) 6(1.283,-5.7)
  round 1 hole 1 unplated: ""(1.156,-2.3) ""(1.181,2.299)
  silkscreen extent 0.04,-5.98 18.78,6.06
牛角座 [mm]
  rect 1.7x2 smd: 1(-5.08,0)
  oval 1.7x2 smd: 2(-2.54,0) 3(0,0) 4(2.54,0) 5(5.08,0)
  silkscreen extent -6.56,-1.27 6.56,1.27

## Part data
C1 C1 C1 C1 C1 C1 C1 C1 C1 C1 C2 C2 C2 C2 C2 C2 C2 C2 C2 C2 C3 C3 C3 C3 C3 C3 C3 C3 C3 C3 C4 C4 C4 C4 C4 C4 C4 C4 C4 C4 C5 C5 C5 C5 C5 C5 C5 C5 C5 C5 C6 C6 C6 C6 C6 C6 C6 C6 C6 C6 C7 C7 C7 C7 C7 C7 C7 C7 C7 C7 C8 C8 C8 C8 C8 C8 C8 C8 C8 C8: library part C-0603
HL1 HL1 HL1 HL1 HL1 HL1 HL1 HL1 HL1 HL1 HL2 HL2 HL2 HL2 HL2 HL2 HL2 HL2 HL2 HL2: library part LED-0805-BLUE, "LED-0805-BLUE"
J3 J3 J3 J3 J3 J3 J3 J3 J3 J3: library part CON-3*2.54
R1 R1 R1 R1 R1 R1 R1 R1 R1 R1 R2 R2 R2 R2 R2 R2 R2 R2 R2 R2 R3 R3 R3 R3 R3 R3 R3 R3 R3 R3 R4 R4 R4 R4 R4 R4 R4 R4 R4 R4 R5 R5 R5 R5 R5 R5 R5 R5 R5 R5 R6 R6 R6 R6 R6 R6 R6 R6 R6 R6 R7 R7 R7 R7 R7 R7 R7 R7 R7 R7 R8 R8 R8 R8 R8 R8 R8 R8 R8 R8 R9 R9 R9 R9 R9 R9 R9 R9 R9 R9 R10 R10 R10 R10 R10 R10 R10 R10 R10 R10 R11 R11 R11 R11 R11 R11 R11 R11 R11 R11 R12 R12 R12 R12 R12 R12 R12 R12 R12 R12 R13 R13 R13 R13 R13 R13 R13 R13 R13 R13 R14 R14 R14 R14 R14 R14 R14 R14 R14 R14 R15 R15 R15 R15 R15 R15 R15 R15 R15 R15 R16 R16 R16 R16 R16 R16 R16 R16 R16 R16 R17 R17 R17 R17 R17 R17 R17 R17 R17 R17 R18 R18 R18 R18 R18 R18 R18 R18 R18 R18 R19 R19 R19 R19 R19 R19 R19 R19 R19 R19: library part R-0603
SWD SWD SWD SWD SWD SWD SWD SWD SWD SWD SWIM SWIM SWIM SWIM SWIM SWIM SWIM SWIM SWIM SWIM: library part CON-5*2.54
USB1 USB1 USB1 USB1 USB1 USB1 USB1 USB1 USB1 USB1: library part "USB-A-A/M Stick plate bent legs VinylPBT With a column"
Y1 Y1 Y1 Y1 Y1 Y1 Y1 Y1 Y1 Y1: library part XTAT

## Via types
v1: diameter 0.6, hole 0.4, Top Layer to Bottom Layer, 520 vias
v2: diameter 0.7, hole 0.5, Top Layer to Bottom Layer, 20 vias
v3: diameter 0.8, hole 0.6, Top Layer to Bottom Layer, 10 vias

## Nets (pads, with @x,y where several pads share a name; then routed paths per layer and width w, separated by ;. In a path a pad name is that pad's centre, name@x,y a point inside that pad or via, vN(x,y) a via of type N, cw(c..) or ccw(c..) an arc to the next point about the centre after c; other vN are vias at no path point)
GND: C1.1 C2.2 C3.1 C4.2 C5.1 C6.2 C7.2 C8.2 HL2.2 J3.3 R6.2 R8.2 R18.1 SWD.5 SWIM.3 U1.1 U2.8 U2.23 U2.35 U2.47 USB1.4 | length 77.6
  Top Layer w0.25: U2.47@88.483,59.504 88.483,58.837 88.9,58.42 90.043,58.42 90.805,59.182 v1(90.805,60.071) ; U2.47@88.483,77.504 88.483,76.837 88.9,76.42 90.043,76.42 90.805,77.182 v1(90.805,78.071) ; U2.47@88.483,95.504 88.483,94.837 88.9,94.42 90.043,94.42 90.805,95.182 v1(90.805,96.071) ; U2.47@88.483,113.504 88.483,112.837 88.9,112.42 90.043,112.42 90.805,113.182 v1(90.805,114.071) ; U2.47@88.483,131.504 88.483,130.837 88.9,130.42 90.043,130.42 90.805,131.182 v1(90.805,132.071) ; v1(139.322,65.846) 139.322,66.735 140.084,67.497 141.227,67.497 141.644,67.08 U2.47@141.644,66.413 ; v1(139.322,83.846) 139.322,84.735 140.084,85.497 141.227,85.497 141.644,85.08 U2.47@141.644,84.413 ; v1(139.322,101.846) 139.322,102.735 140.084,103.497 141.227,103.497 141.644,103.08 U2.47@141.644,102.413 ; v1(139.322,119.846) 139.322,120.735 140.084,121.497 141.227,121.497 141.644,121.08 U2.47@141.644,120.413 ; v1(139.322,137.846) 139.322,138.735 140.084,139.497 141.227,139.497 141.644,139.08 U2.47@141.644,138.413
  Top Layer w0.254: v1@80.681,61.504 U2.35@81.983,61.504 ; v1@80.681,79.504 U2.35@81.983,79.504 ; v1@80.681,97.504 U2.35@81.983,97.504 ; v1@80.681,115.504 U2.35@81.983,115.504 ; v1@80.681,133.504 U2.35@81.983,133.504 ; v1(88.773,63.881) 89.396,64.504 U2.8@90.483,64.504 ; v1(88.773,81.881) 89.396,82.504 U2.8@90.483,82.504 ; v1(88.773,99.881) 89.396,100.504 U2.8@90.483,100.504 ; v1(88.773,117.881) 89.396,118.504 U2.8@90.483,118.504 ; v1(88.773,135.881) 89.396,136.504 U2.8@90.483,136.504 ; U2.8@139.644,61.413 140.731,61.413 v1(141.354,62.036) ; U2.8@139.644,79.413 140.731,79.413 v1(141.354,80.036) ; U2.8@139.644,97.413 140.731,97.413 v1(141.354,98.036) ; U2.8@139.644,115.413 140.731,115.413 v1(141.354,116.036) ; U2.8@139.644,133.413 140.731,133.413 v1(141.354,134.036) ; U2.35@148.144,64.413 v1@149.446,64.413 ; U2.35@148.144,82.413 v1@149.446,82.413 ; U2.35@148.144,100.413 v1@149.446,100.413 ; U2.35@148.144,118.413 v1@149.446,118.413 ; U2.35@148.144,136.413 v1@149.446,136.413
  Bottom Layer w0.254: SWD.5@112.014,67.945 SWD.5@112.014,68.072 ; SWD.5@112.014,85.945 SWD.5@112.014,86.072 ; SWD.5@112.014,103.945 SWD.5@112.014,104.072 ; SWD.5@112.014,121.945 SWD.5@112.014,122.072 ; SWD.5@112.014,139.945 SWD.5@112.014,140.072 ; SWD.5@118.113,57.845 SWD.5@118.113,57.972 ; SWD.5@118.113,75.845 SWD.5@118.113,75.972 ; SWD.5@118.113,93.845 SWD.5@118.113,93.972 ; SWD.5@118.113,111.845 SWD.5@118.113,111.972 ; SWD.5@118.113,129.845 SWD.5@118.113,129.972
  other v1: 143.767,54.797 70.485,55.118 71.628,55.118 156.594,55.305 157.61,55.305 158.626,55.305 120.145,55.432 120.907,55.432 90.805,56.007 116.335,56.067 152.022,56.194 89.789,56.388 120.145,56.448 147.323,56.448 133.226,57.083 150.498,57.083 116.335,57.21 149.736,57.591 133.226,57.845 116.335,58.226 68.707,59.563 161.547,60.258 68.834,60.579 161.42,61.274 80.645,61.468 68.707,61.722 161.547,62.163 68.707,62.738 161.42,63.179 68.58,63.754 161.42,64.195 149.482,64.449 68.707,64.643 161.293,65.338 68.58,65.659 161.42,66.354 113.792,67.691 96.901,68.072 80.391,68.326 113.792,68.707 79.629,68.834 96.901,68.834 82.804,69.469 109.982,69.469 140.338,69.529 78.105,69.723 113.792,69.85 139.322,69.91 109.22,70.485 109.982,70.485 71.501,70.612 72.517,70.612 73.533,70.612 158.499,70.799 159.642,70.799 86.36,71.12 143.767,72.797 70.485,73.118 71.628,73.118 156.594,73.305 157.61,73.305 158.626,73.305 120.145,73.432 120.907,73.432 90.805,74.007 116.335,74.067 152.022,74.194 89.789,74.388 120.145,74.448 147.323,74.448 133.226,75.083 150.498,75.083 116.335,75.21 149.736,75.591 133.226,75.845 116.335,76.226 68.707,77.563 161.547,78.258 68.834,78.579 161.42,79.274 80.645,79.468 68.707,79.722 161.547,80.163 68.707,80.738 161.42,81.179 68.58,81.754 161.42,82.195 149.482,82.449 68.707,82.643 161.293,83.338 68.58,83.659 161.42,84.354 113.792,85.691 96.901,86.072 80.391,86.326 113.792,86.707 79.629,86.834 96.901,86.834 82.804,87.469 109.982,87.469 140.338,87.529 78.105,87.723 113.792,87.85 139.322,87.91 109.22,88.485 109.982,88.485 71.501,88.612 72.517,88.612 73.533,88.612 158.499,88.799 159.642,88.799 86.36,89.12 143.767,90.797 70.485,91.118 71.628,91.118 156.594,91.305 157.61,91.305 158.626,91.305 120.145,91.432 120.907,91.432 90.805,92.007 116.335,92.067 152.022,92.194 89.789,92.388 120.145,92.448 147.323,92.448 133.226,93.083 150.498,93.083 116.335,93.21 149.736,93.591 133.226,93.845 116.335,94.226 68.707,95.563 161.547,96.258 68.834,96.579 161.42,97.274 80.645,97.468 68.707,97.722 161.547,98.163 68.707,98.738 161.42,99.179 68.58,99.754 161.42,100.195 149.482,100.449 68.707,100.643 161.293,101.338 68.58,101.659 161.42,102.354 113.792,103.691 96.901,104.072 80.391,104.326 113.792,104.707 79.629,104.834 96.901,104.834 82.804,105.469 109.982,105.469 140.338,105.529 78.105,105.723 113.792,105.85 139.322,105.91 109.22,106.485 109.982,106.485 71.501,106.612 72.517,106.612 73.533,106.612 158.499,106.799 159.642,106.799 86.36,107.12 143.767,108.797 70.485,109.118 71.628,109.118 156.594,109.305 157.61,109.305 158.626,109.305 120.145,109.432 120.907,109.432 90.805,110.007 116.335,110.067 152.022,110.194 89.789,110.388 120.145,110.448 147.323,110.448 133.226,111.083 150.498,111.083 116.335,111.21 149.736,111.591 133.226,111.845 116.335,112.226 68.707,113.563 161.547,114.258 68.834,114.579 161.42,115.274 80.645,115.468 68.707,115.722 161.547,116.163 68.707,116.738 161.42,117.179 68.58,117.754 161.42,118.195 149.482,118.449 68.707,118.643 161.293,119.338 68.58,119.659 161.42,120.354 113.792,121.691 96.901,122.072 80.391,122.326 113.792,122.707 79.629,122.834 96.901,122.834 82.804,123.469 109.982,123.469 140.338,123.529 78.105,123.723 113.792,123.85 139.322,123.91 109.22,124.485 109.982,124.485 71.501,124.612 72.517,124.612 73.533,124.612 158.499,124.799 159.642,124.799 86.36,125.12 143.767,126.797 70.485,127.118 71.628,127.118 156.594,127.305 157.61,127.305 158.626,127.305 120.145,127.432 120.907,127.432 90.805,128.007 116.335,128.067 152.022,128.194 89.789,128.388 120.145,128.448 147.323,128.448 133.226,129.083 150.498,129.083 116.335,129.21 149.736,129.591 133.226,129.845 116.335,130.226 68.707,131.563 161.547,132.258 68.834,132.579 161.42,133.274 80.645,133.468 68.707,133.722 161.547,134.163 68.707,134.738 161.42,135.179 68.58,135.754 161.42,136.195 149.482,136.449 68.707,136.643 161.293,137.338 68.58,137.659 161.42,138.354 113.792,139.691 96.901,140.072 80.391,140.326 113.792,140.707 79.629,140.834 96.901,140.834 82.804,141.469 109.982,141.469 140.338,141.529 78.105,141.723 113.792,141.85 139.322,141.91 109.22,142.485 109.982,142.485 71.501,142.612 72.517,142.612 73.533,142.612 158.499,142.799 159.642,142.799 86.36,143.12
"ISP SWCLK": J3.2 U2.37 | length 116.4
  Top Layer w0.2: J3.2@76.708,55.626 78.105,54.229 80.137,54.229 80.645,54.737 80.645,56.642 81.534,57.531 83.185,57.531 83.483,57.829 U2.37@83.483,59.504 ; J3.2@76.708,73.626 78.105,72.229 80.137,72.229 80.645,72.737 80.645,74.642 81.534,75.531 83.185,75.531 83.483,75.829 U2.37@83.483,77.504 ; J3.2@76.708,91.626 78.105,90.229 80.137,90.229 80.645,90.737 80.645,92.642 81.534,93.531 83.185,93.531 83.483,93.829 U2.37@83.483,95.504 ; J3.2@76.708,109.626 78.105,108.229 80.137,108.229 80.645,108.737 80.645,110.642 81.534,111.531 83.185,111.531 83.483,111.829 U2.37@83.483,113.504 ; J3.2@76.708,127.626 78.105,126.229 80.137,126.229 80.645,126.737 80.645,128.642 81.534,129.531 83.185,129.531 83.483,129.829 U2.37@83.483,131.504 ; U2.37@146.644,66.413 146.644,68.088 146.942,68.386 148.593,68.386 149.482,69.275 149.482,71.18 149.99,71.688 152.022,71.688 J3.2@153.419,70.291 ; U2.37@146.644,84.413 146.644,86.088 146.942,86.386 148.593,86.386 149.482,87.275 149.482,89.18 149.99,89.688 152.022,89.688 J3.2@153.419,88.291 ; U2.37@146.644,102.413 146.644,104.088 146.942,104.386 148.593,104.386 149.482,105.275 149.482,107.18 149.99,107.688 152.022,107.688 J3.2@153.419,106.291 ; U2.37@146.644,120.413 146.644,122.088 146.942,122.386 148.593,122.386 149.482,123.275 149.482,125.18 149.99,125.688 152.022,125.688 J3.2@153.419,124.291 ; U2.37@146.644,138.413 146.644,140.088 146.942,140.386 148.593,140.386 149.482,141.275 149.482,143.18 149.99,143.688 152.022,143.688 J3.2@153.419,142.291
"ISP SWDIO": J3.1 U2.34 | length 110.2
  Top Layer w0.254: J3.1@79.248,55.626 79.248,56.388 81.28,58.42 82.042,58.42 v1(82.042,60.071) ; J3.1@79.248,73.626 79.248,74.388 81.28,76.42 82.042,76.42 v1(82.042,78.071) ; J3.1@79.248,91.626 79.248,92.388 81.28,94.42 82.042,94.42 v1(82.042,96.071) ; J3.1@79.248,109.626 79.248,110.388 81.28,112.42 82.042,112.42 v1(82.042,114.071) ; J3.1@79.248,127.626 79.248,128.388 81.28,130.42 82.042,130.42 v1(82.042,132.071) ; U2.34@81.983,62.004 83.919,62.004 v1(83.947,61.976) ; U2.34@81.983,80.004 83.919,80.004 v1(83.947,79.976) ; U2.34@81.983,98.004 83.919,98.004 v1(83.947,97.976) ; U2.34@81.983,116.004 83.919,116.004 v1(83.947,115.976) ; U2.34@81.983,134.004 83.919,134.004 v1(83.947,133.976) ; v1(146.18,63.941) 146.208,63.913 U2.34@148.144,63.913 ; v1(146.18,81.941) 146.208,81.913 U2.34@148.144,81.913 ; v1(146.18,99.941) 146.208,99.913 U2.34@148.144,99.913 ; v1(146.18,117.941) 146.208,117.913 U2.34@148.144,117.913 ; v1(146.18,135.941) 146.208,135.913 U2.34@148.144,135.913 ; v1(148.085,65.846) 148.085,67.497 148.847,67.497 150.879,69.529 J3.1@150.879,70.291 ; v1(148.085,83.846) 148.085,85.497 148.847,85.497 150.879,87.529 J3.1@150.879,88.291 ; v1(148.085,101.846) 148.085,103.497 148.847,103.497 150.879,105.529 J3.1@150.879,106.291 ; v1(148.085,119.846) 148.085,121.497 148.847,121.497 150.879,123.529 J3.1@150.879,124.291 ; v1(148.085,137.846) 148.085,139.497 148.847,139.497 150.879,141.529 J3.1@150.879,142.291
  Bottom Layer w0.254: v1(82.042,60.071) 82.55,60.071 83.947,61.468 v1(83.947,61.976) ; v1(82.042,78.071) 82.55,78.071 83.947,79.468 v1(83.947,79.976) ; v1(82.042,96.071) 82.55,96.071 83.947,97.468 v1(83.947,97.976) ; v1(82.042,114.071) 82.55,114.071 83.947,115.468 v1(83.947,115.976) ; v1(82.042,132.071) 82.55,132.071 83.947,133.468 v1(83.947,133.976) ; v1(146.18,63.941) 146.18,64.449 147.577,65.846 v1(148.085,65.846) ; v1(146.18,81.941) 146.18,82.449 147.577,83.846 v1(148.085,83.846) ; v1(146.18,99.941) 146.18,100.449 147.577,101.846 v1(148.085,101.846) ; v1(146.18,117.941) 146.18,118.449 147.577,119.846 v1(148.085,119.846) ; v1(146.18,135.941) 146.18,136.449 147.577,137.846 v1(148.085,137.846)
JTCK: R3.2 U2.15 U2.26 | length 330.3
  Top Layer w0.25: U2.26@81.983,66.004 83.094,66.004 83.566,65.532 83.566,65.278 v1(83.693,65.151) ; U2.26@81.983,84.004 83.094,84.004 83.566,83.532 83.566,83.278 v1(83.693,83.151) ; U2.26@81.983,102.004 83.094,102.004 83.566,101.532 83.566,101.278 v1(83.693,101.151) ; U2.26@81.983,120.004 83.094,120.004 83.566,119.532 83.566,119.278 v1(83.693,119.151) ; U2.26@81.983,138.004 83.094,138.004 83.566,137.532 83.566,137.278 v1(83.693,137.151) ; U2.15@87.983,68.004 88.011,67.976 v1(88.011,66.167) ; U2.15@87.983,86.004 88.011,85.976 v1(88.011,84.167) ; U2.15@87.983,104.004 88.011,103.976 v1(88.011,102.167) ; U2.15@87.983,122.004 88.011,121.976 v1(88.011,120.167) ; U2.15@87.983,140.004 88.011,139.976 v1(88.011,138.167) ; v1(142.116,59.75) 142.116,57.941 U2.15@142.144,57.913 ; v1(142.116,77.75) 142.116,75.941 U2.15@142.144,75.913 ; v1(142.116,95.75) 142.116,93.941 U2.15@142.144,93.913 ; v1(142.116,113.75) 142.116,111.941 U2.15@142.144,111.913 ; v1(142.116,131.75) 142.116,129.941 U2.15@142.144,129.913 ; v1(146.434,60.766) 146.561,60.639 146.561,60.385 147.033,59.913 U2.26@148.144,59.913 ; v1(146.434,78.766) 146.561,78.639 146.561,78.385 147.033,77.913 U2.26@148.144,77.913 ; v1(146.434,96.766) 146.561,96.639 146.561,96.385 147.033,95.913 U2.26@148.144,95.913 ; v1(146.434,114.766) 146.561,114.639 146.561,114.385 147.033,113.913 U2.26@148.144,113.913 ; v1(146.434,132.766) 146.561,132.639 146.561,132.385 147.033,131.913 U2.26@148.144,131.913
  Bottom Layer w0.25: v1(83.693,65.151) 83.947,65.405 87.503,65.405 88.011,65.913 v1(88.011,66.167) 88.011,69.469 88.392,69.85 100.203,69.85 104.775,65.278 104.775,64.386 R3.2@105.534,63.627 ; v1(83.693,83.151) 83.947,83.405 87.503,83.405 88.011,83.913 v1(88.011,84.167) 88.011,87.469 88.392,87.85 100.203,87.85 104.775,83.278 104.775,82.386 R3.2@105.534,81.627 ; v1(83.693,101.151) 83.947,101.405 87.503,101.405 88.011,101.913 v1(88.011,102.167) 88.011,105.469 88.392,105.85 100.203,105.85 104.775,101.278 104.775,100.386 R3.2@105.534,99.627 ; v1(83.693,119.151) 83.947,119.405 87.503,119.405 88.011,119.913 v1(88.011,120.167) 88.011,123.469 88.392,123.85 100.203,123.85 104.775,119.278 104.775,118.386 R3.2@105.534,117.627 ; v1(83.693,137.151) 83.947,137.405 87.503,137.405 88.011,137.913 v1(88.011,138.167) 88.011,141.469 88.392,141.85 100.203,141.85 104.775,137.278 104.775,136.386 R3.2@105.534,135.627 ; R3.2@124.593,62.29 125.352,61.531 125.352,60.639 129.924,56.067 141.735,56.067 142.116,56.448 v1(142.116,59.75) 142.116,60.004 142.624,60.512 146.18,60.512 v1(146.434,60.766) ; R3.2@124.593,80.29 125.352,79.531 125.352,78.639 129.924,74.067 141.735,74.067 142.116,74.448 v1(142.116,77.75) 142.116,78.004 142.624,78.512 146.18,78.512 v1(146.434,78.766) ; R3.2@124.593,98.29 125.352,97.531 125.352,96.639 129.924,92.067 141.735,92.067 142.116,92.448 v1(142.116,95.75) 142.116,96.004 142.624,96.512 146.18,96.512 v1(146.434,96.766) ; R3.2@124.593,116.29 125.352,115.531 125.352,114.639 129.924,110.067 141.735,110.067 142.116,110.448 v1(142.116,113.75) 142.116,114.004 142.624,114.512 146.18,114.512 v1(146.434,114.766) ; R3.2@124.593,134.29 125.352,133.531 125.352,132.639 129.924,128.067 141.735,128.067 142.116,128.448 v1(142.116,131.75) 142.116,132.004 142.624,132.512 146.18,132.512 v1(146.434,132.766)